# Altium PCB PCB.PcbDoc
Units mil, origin at the board's own origin, x right, y up, seen from the top; angles counter-clockwise.
Board outline 2320 x 2320 mil, 2 copper layers (Top Layer, Bottom Layer); 27 components, 30 nets, 103 pads, 4 vias.
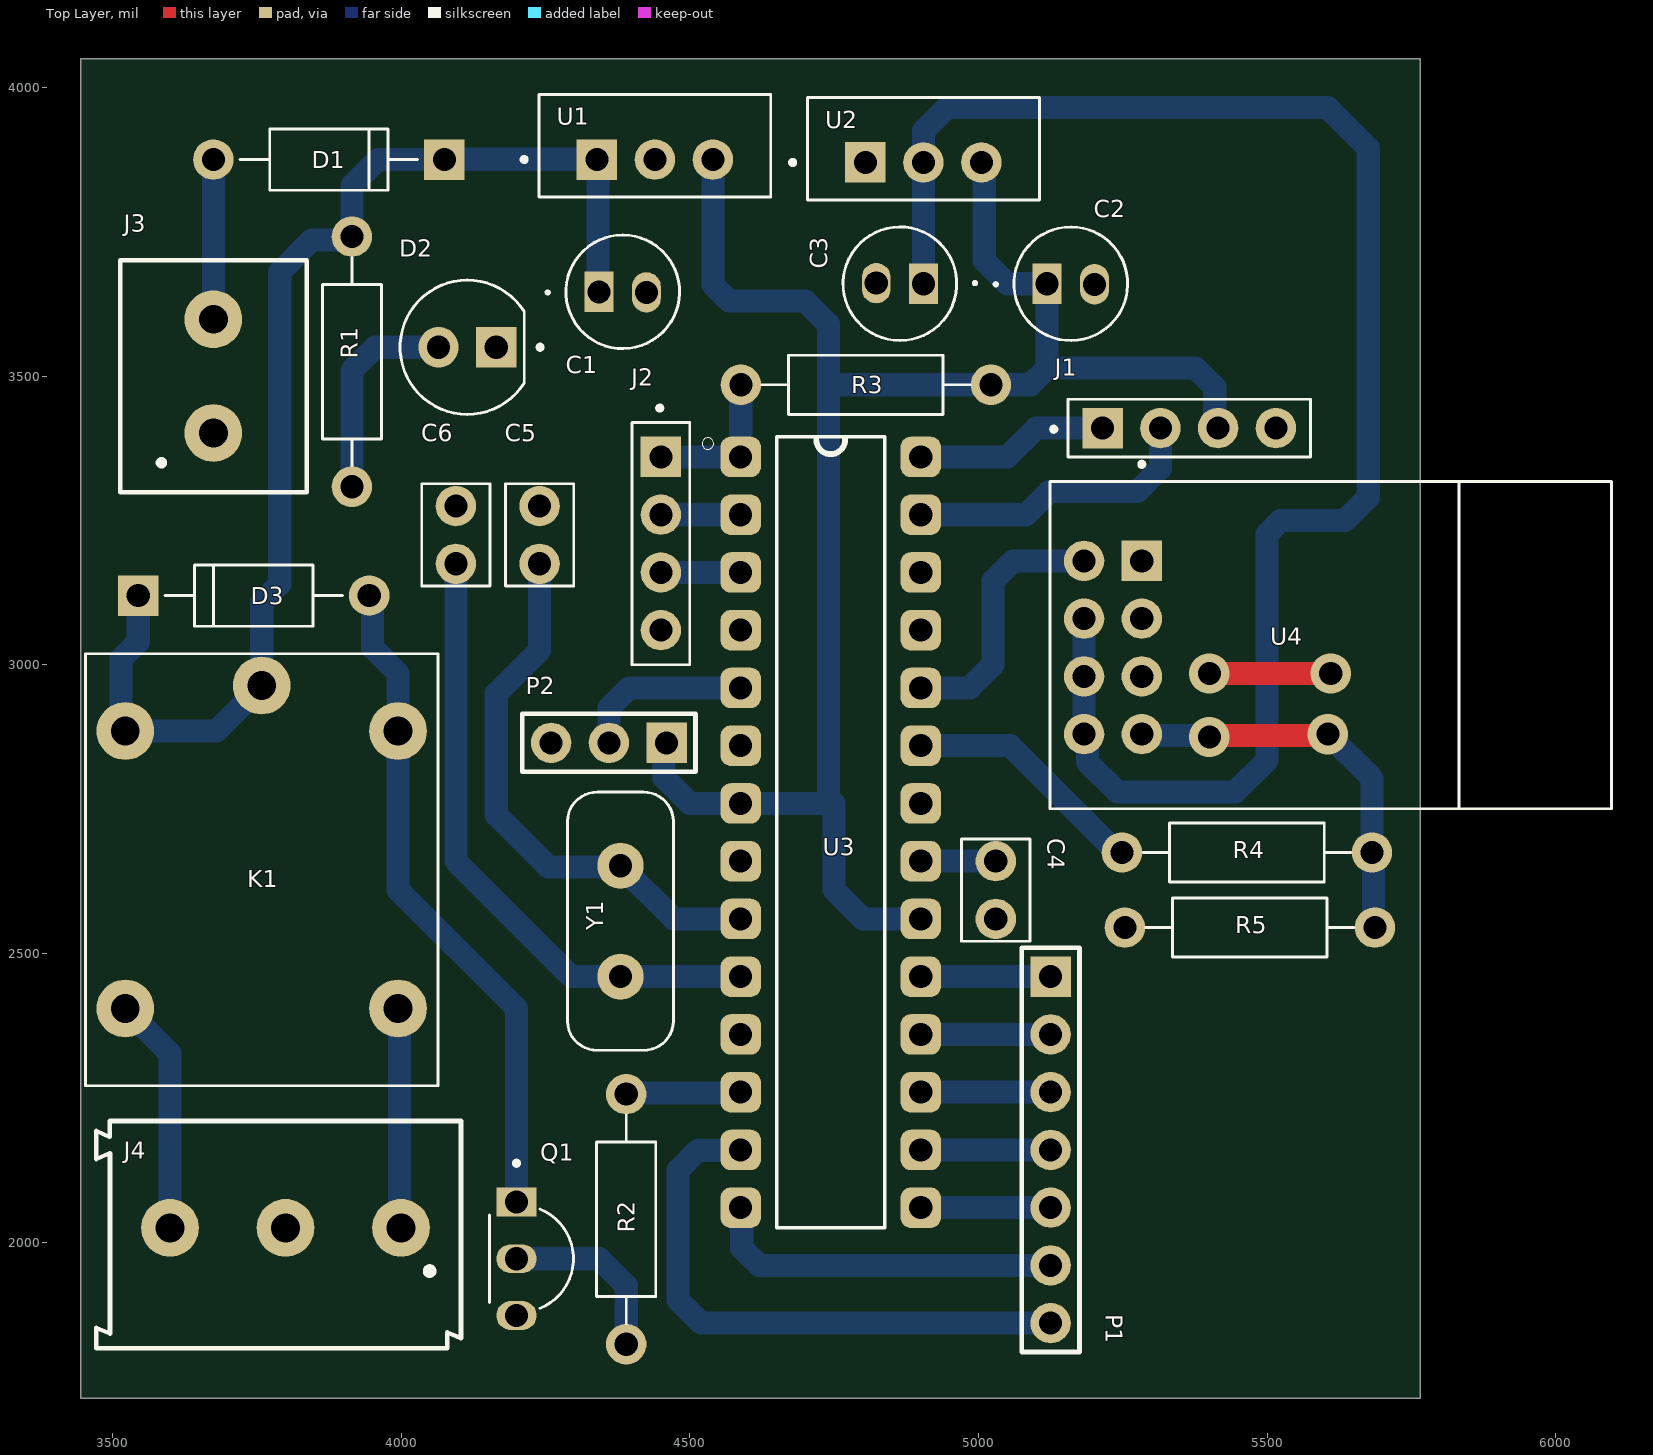
[diagram p0: Top Layer view]
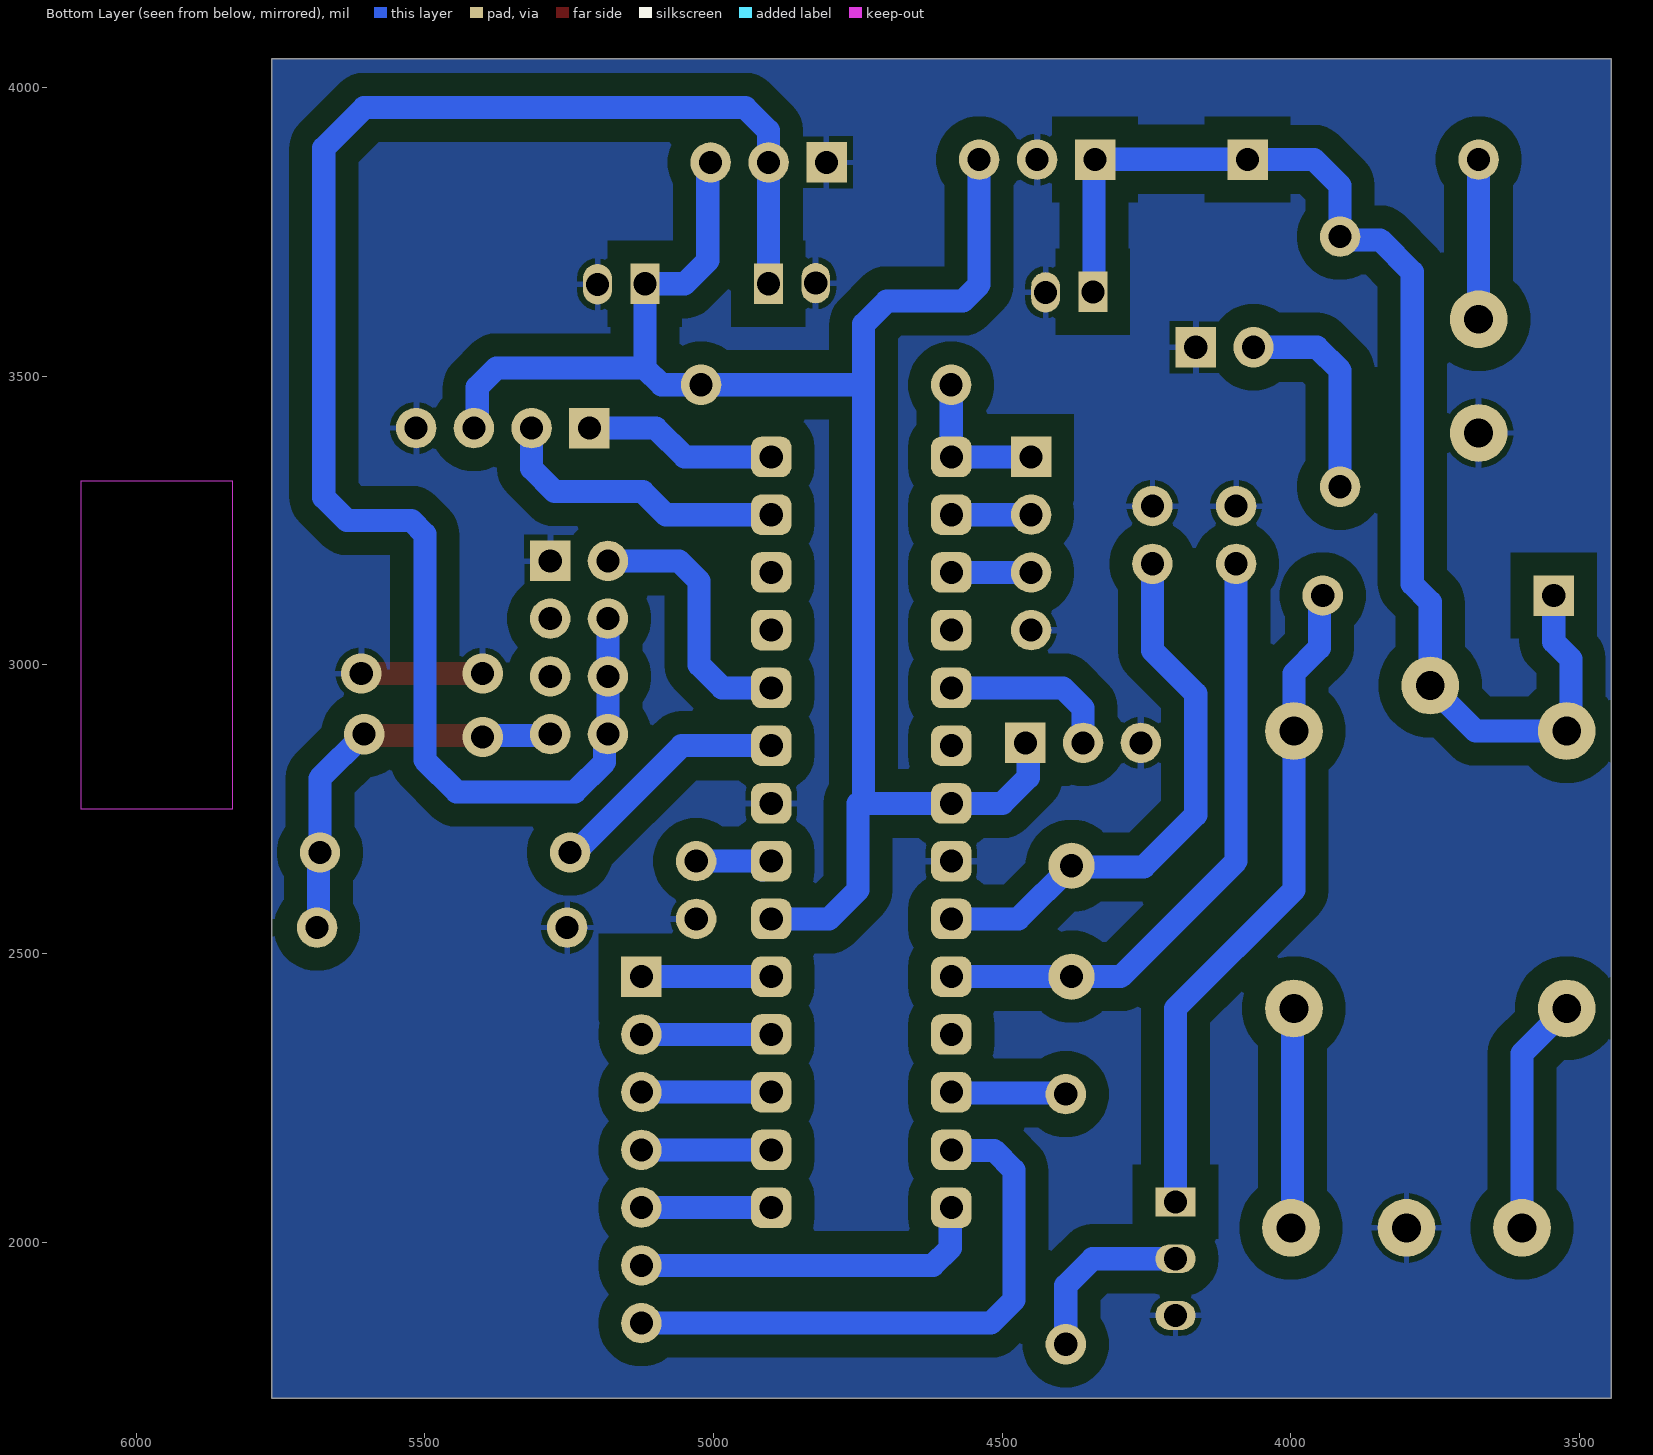
[diagram p1: Bottom Layer view, seen from below]
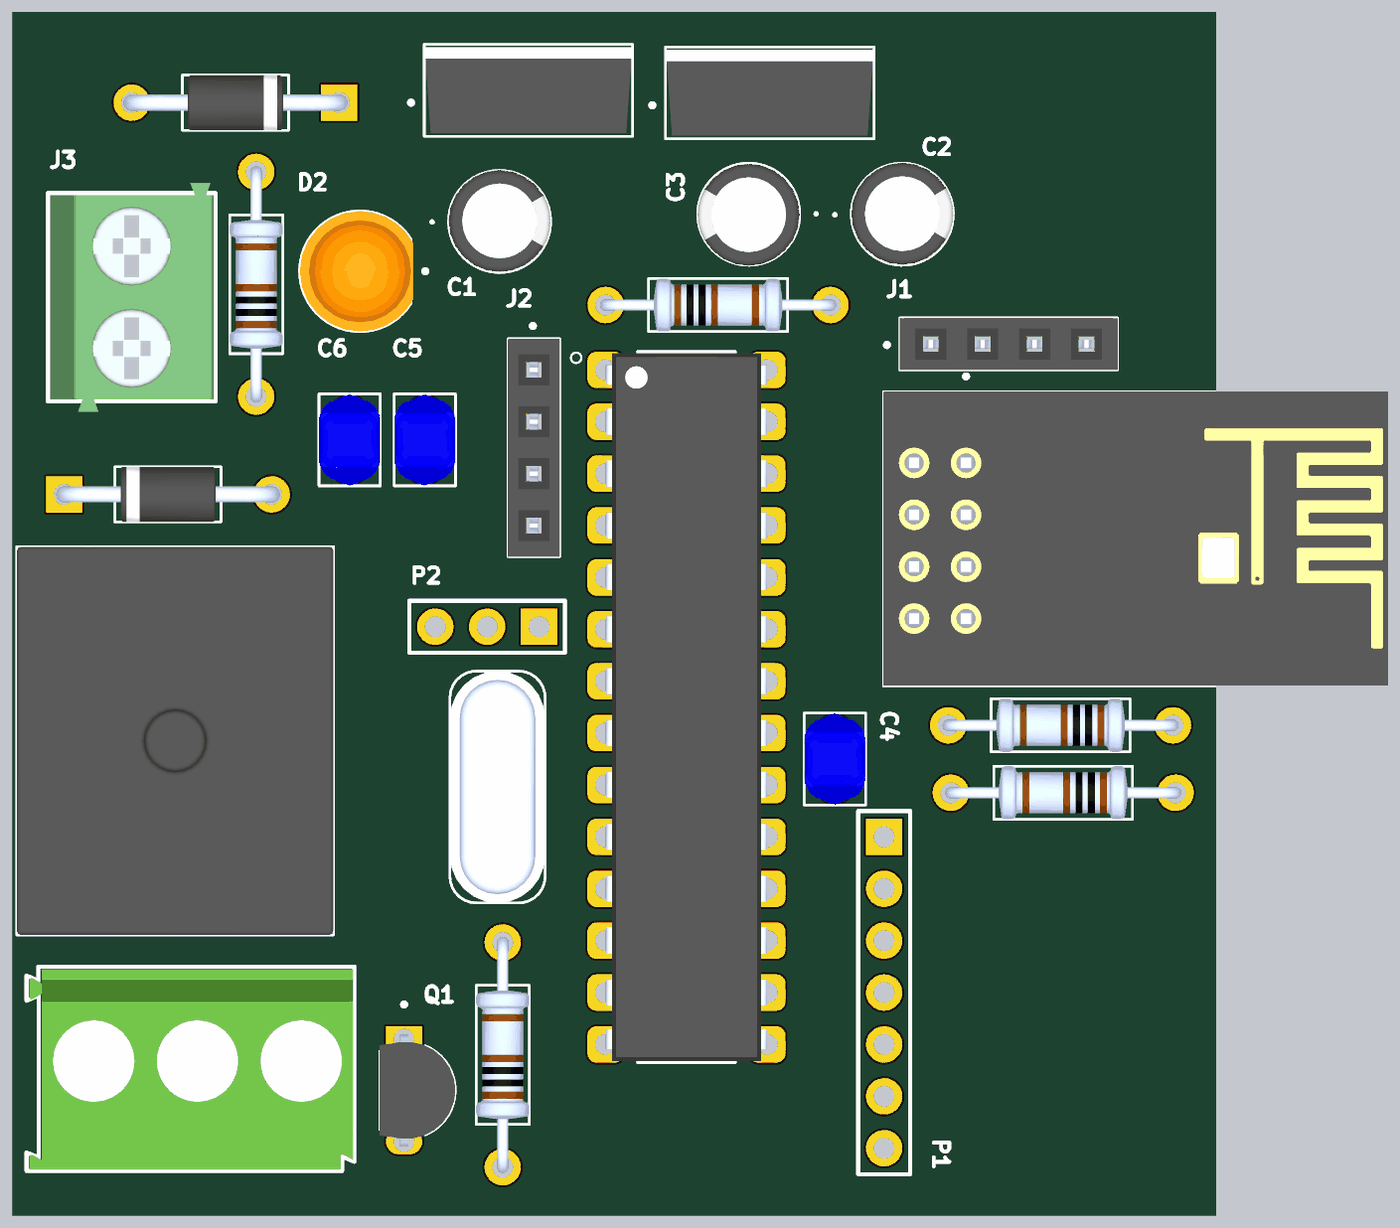
[diagram p2: 3D render of the assembled board from above, using the file's embedded part models]

## Layer stack, top to bottom
Top Solder: solder mask 0.4, Solder Resist, Dk 3.5
Top Layer: signal copper 1.4
Dielectric 1: dielectric 12.6, FR-4, Dk 4.8
Bottom Layer: signal copper 1.4
Bottom Solder: solder mask 0.4, Solder Resist, Dk 3.5

## Board outline
3445,1730 5765,1730 5765,4050 3445,4050

## Design rules (kind name [scope] priority, off if disabled: settings)
Clearance [All] p1: gap=30 ignorepadtopadclearanceinfootprint=FALSE
PolygonConnect [All] p1: connectstyle=Relief reliefconductorwidth=10 reliefentries=4 polygonreliefangle="90 Angle" airgapwidth=10
RoutingVias [All] p1: holewidth=40 width=70 viastyle="Through Hole" minholewidth=40 minwidth=70 maxholewidth=40 maxwidth=70
SolderMaskExpansion [All] p1: expansion=4 istentingtop=FALSE
Width [All] p1: maxlimit=60 minlimit=40 preferedwidth=50
30 further rules are at their usual default settings.

## Components (designator, comment, footprint, x,y, rotation, side; value= is the part's Value field where it differs from the comment)
C1 "100uF" CAPPRD500W50D500H1100 4384,3646 r0 top
C2 "10uF" CAPPRD500W50D500H1100 5160,3660 r0 top
C3 "10uF" CAPPRD500W50D500H1100 4864,3660 r180 top
C4 "100nF" CAPRB500W50L450T300H550 5030,2660 r270 top
C5 "22pF" CAPRB500W50L450T300H550 4240,3175 r90 top
C6 "22pF" CAPRB500W50L450T300H550 4095,3175 r90 top
D1 "1N4007" DIOAD1060W80L520D270 3875,3875 r180 top
D2 "L08R5000Q1" LEDRD254W57D500H1070 4115,3550 r180 top
D3 "1N4007" DIOAD1060W80L520D270 3745,3120 r0 top
J1 "Header 4" SULLINS_PPTC041LFBN-RC 5365,3410 r0 top
J2 "Header 4" SULLINS_PPTC041LFBN-RC 4450,3210 r270 top
J3 "691111710002" 691111710002 3675,3500 r90 top
J4 "691216510003S" "Terminal block - 3Pins" 3800,2025 r180 top
K1 "JQC-3F-1C-24VDC" RELAY_JQC-3F-1C-24VDC 3758.78,2645.16 r90 top
P1 "Header 7" HDR1X7 5125,2460 r270 top
P2 "Header 3" HDR1X3 4460,2865 r180 top
Q1 "BJT Transistor" TO92250P510H770-3 4225.79,1971.57 r270 top
R1 "1k" RESAD1100W55L680D260 3915,3525 r270 top
R2 "1k" RESAD1100W55L680D260 4390,2040 r270 top
R3 "10k" RESAD1100W55L680D260 4805,3485 r180 top
R4 "1k1" RESAD1100W55L680D260 5465,2675 r0 top
R5 "2k2" RESAD1100W55L680D260 5470,2545 r0 top
U1 "LM78__" TO255P1020X450X1968-3 4439.61,3898.82 r0 top
U2 "LD1117V33" TO255P1020X450X1968-3 4904.61,3893.82 r0 top
U3 "ATMEGA328P-PU" DIP794W46P254L2967H457Q28B 4744.09,2710 r0 top
U4 "ESP8266-01/ESP-01" XCVR_ESP8266-01/ESP-01 5610,3030 r270 top
Y1 "16MHz" XTAL_ECS-160-20-4X 4380,2556.06 r270 top

## Footprints (in the part's own frame and the unit in brackets; to place one, negate y for a bottom-side part, rotate by r counter-clockwise, add the part's x,y. Pads: shape width x height; smd on the part's side, far side on the other; paste and mask are expansions set on the pad)
691111710002 [mm]
  round 2.54 hole 1.27: 1(-2.5,0) 2(2.5,0)
  silkscreen extent -5.1,-4.1 5.1,4.1, body extent -5.6,-4 5.6,4, height 11.01
CAPPRD500W50D500H1100 [mil]
  oval 50x70 hole 40: N(41,-1)
  rect 50x70 hole 40: P(-41,0)
  silkscreen extent -131,-98 98,98, body extent -108,-97 108,99, height 434
CAPRB500W50L450T300H550 [mil]
  round 70 hole 40: 1(0,0) 2(100,0)
  silkscreen extent -39,-59 139,59, body extent -38,-59 138,59, height 210
DIOAD1060W80L520D270 [mil]
  round 70 hole 40: A(200,0)
  rect 70x70 hole 40: C(-200,0)
  silkscreen extent -154,-53 154,53, body extent -216,-53 216,53, height 99
DIP794W46P254L2967H457Q28B [mil]
  rrect50% 70x70 hole 40: 1(-155.91,650) 2(-155.91,550) 3(-155.91,450) 4(-155.91,350) 5(-155.91,250) 6(-155.91,150) 7(-155.91,50) 8(-155.91,-50) 9(-155.91,-150) 10(-155.91,-250) 11(-155.91,-350) 12(-155.91,-450) 13(-155.91,-550) 14(-155.91,-650) 15(155.91,-650) 16(155.91,-550) 17(155.91,-450) 18(155.91,-350) 19(155.91,-250) 20(155.91,-150) 21(155.91,-50) 22(155.91,50) 23(155.91,150) 24(155.91,250) 25(155.91,350) 26(155.91,450) 27(155.91,550) 28(155.91,650)
  silkscreen extent -223,-685 94,685, body extent -156,-682 156,683, height 180
HDR1X3 [mil] "Connector; Header; 3 Position"
  rect 70x70 hole 40: 1(0,0)
  round 70 hole 40: 2(100,0) 3(200,0)
  silkscreen extent -50,-50 250,50
HDR1X7 [mil] "Connector; Header; 7 Position"
  rect 70x70 hole 40: 1(0,0)
  round 70 hole 40: 2(100,0) 3(200,0) 4(300,0) 5(400,0) 6(500,0) 7(600,0)
  silkscreen extent -50,-50 650,50
LEDRD254W57D500H1070 [mil]
  round 70 hole 40: A(50,0)
  rect 70x70 hole 40: C(-50,0)
  silkscreen extent -130,-116 116,116, body extent -102,-116 116,116, height 358
RELAY_JQC-3F-1C-24VDC [mm]
  round 2.54 hole 1.27: COIL1(6.1,6) COIL2(6.1,-6) COM(8.1,0) NC(-6.1,-6) NO(-6.1,6)
  silkscreen extent -9.5,-7.75 9.5,7.75, body extent -9.5,-7.75 9.5,7.75, height 15.51
RESAD1100W55L680D260 [mil]
  round 70 hole 40: 1(-216.54,0) 2(216.54,0)
  silkscreen extent -180,-51 180,51, body extent -227,-51 227,51, height 101
SULLINS_PPTC041LFBN-RC [mil]
  rect 70x70 hole 40: 1(-150,0)
  round 70 hole 40: 2(-50,0) 3(50,0) 4(150,0)
  silkscreen extent -239,-50 210,50, body extent -210,-50 210,50, height 335
"Terminal block - 3Pins" [mil]
  round 100 hole 50: 1(-200,0) 2(0,0) 3(200,0)
  silkscreen extent -304,-185 328,209, body extent -302,-180 322,206, height 543
TO255P1020X450X1968-3 [mil]
  rect 70x70 hole 40: 1(-100.39,-23.82)
  round 70 hole 40: 2(0,-23.82) 3(100.39,-23.82)
  silkscreen extent -230,-89 201,89, body extent -200,-82 200,83, height 901
TO92250P510H770-3 [mil]
  rect 50x70 hole 40: 1(-98.43,-25.79)
  oval 50x70 hole 40: 2(0,-25.79) 3(98.43,-25.79)
  silkscreen extent -169,-73 86,73, body extent -107,-73 107,73, height 343
XCVR_ESP8266-01/ESP-01 [mil]
  rect 70x70 hole 40: 1(-150,-327.17)
  round 70 hole 40: 2(-50,-327.17) 3(50,-327.17) 4(150,-327.17) 5(-150,-427.17) 6(-50,-427.17) 7(50,-427.17) 8(150,-427.17)
  Keep-Out Layer region: 279.13,222.44 -287.8,222.44 -287.8,486.22 279.13,486.22
  silkscreen extent -321,-486 279,486, body extent -288,-486 278,486, height 256
XTAL_ECS-160-20-4X [mil]
  round 80 hole 40: 1(-96.06,0) 2(96.06,0)
  silkscreen extent -223,-92 223,92, body extent -223,-92 223,92, height 138

## Part data
C1 C2 C3: library part "Electrolytic capacitor", "FS-A", Package=None, Availability=Unavailable, MF="{'manufacturer': u'Panasonic'}", MP=EEUFS0J221B, Price=None
C4 C5 C6: library part "Ceramic capacitor", "2200 pF Â±10% 250V Ceramic Capacitor X7R Radial", Package="Radial TDK", Check_prices=https://www.snapeda.com/parts/FG24X7R2E222KNT06/TDK/view-part/?ref=eda, Digi-Key_Part_Number=445-173386-1-ND, MF=TDK, MP=FG24X7R2E222KNT06, Purchase-URL=https://pricing.snapeda.com/search/part/FG24X7R2E222KNT06/?ref=eda, SnapEDA_Link=https://www.snapeda.com/parts/FG24X7R2E222KNT06/TDK/view-part/?ref=snap
D1 D3: "Diode Switching 1KV 1A 2-Pin DO-41", Package=None, Availability=Unavailable, MP=1N4007, Price=None
D2: library part LED, "LED, Orange, Through Hole, T-1 3/4 (5mm), 30 mA, 2.1 V, 635 nm", Package=None, Availability=Unavailable, MF="{'manufacturer': u'LED Technology'}", MP=L08R5000Q1, Price=None
J1 J2: library part "Female header - 4Pins", "4 Position Header Connector Through Hole", Package=None, Availability=Warning, Check_prices=https://www.snapeda.com/parts/PPTC041LFBN-RC/Sullins%20Connector%20Solutions/view-part/285917/?ref=eda, MF="Sullins Connector", MP=PPTC041LFBN-RC, Price=None, Purchase-URL=https://pricing.snapeda.com/search/part/PPTC041LFBN-RC/?ref=eda, SnapEDA_Link=https://www.snapeda.com/parts/PPTC041LFBN-RC/Sullins%20Connector%20Solutions/view-part/285917/?ref=snap
J3: library part "Terminal Block - 2Pins", "2 Position Wire to Board Terminal Block Horizontal with Board 0.197 _5.00mm_ Through Hole", Package=None, Availability=Unavailable, MF="Wurth Electronics", MP=691111710002, Price=None, SnapEDA_Link=https://www.snapeda.com/parts/691111710002/Wurth%20Electronics%20Inc./view-part/1195092/?ref=snap
J4: library part "3Pins Terminal block", "5.08 MM TERMINAL BLOCK;", Package=None, Availability="In Stock", Check_prices=https://www.snapeda.com/parts/691216510003S/Wurth+Electronics+Inc/view-part/?ref=eda, MF="Wurth Electronics", MP=691216510003S, Price=None, Purchase-URL=https://pricing.snapeda.com/search/part/691216510003S/?ref=eda, SnapEDA_Link=https://www.snapeda.com/parts/691216510003S/Wurth+Electronics+Inc/view-part/?ref=snap
K1: library part "Relay (Standard)", "Miniature PCB Relay 24VDC, 10A 250VAC, 15A 125VAC, 10A 250VAC", Package=None, Availability=Unavailable, MP=JQC-3F-1C-24VDC, Price=None
P1: "Header, 7-Pin", LatestRevisionDate=17-Jul-2002, LatestRevisionNote="Re-released for DXP Platform.", Publisher="Altium Limited"
P2: "Header, 3-Pin", LatestRevisionDate=17-Jul-2002, LatestRevisionNote="Re-released for DXP Platform.", Publisher="Altium Limited"
Q1: library part BC547B, "<a href=\"https://pricing.snapeda.com/parts/BC337-16%20A1/Taiwan%20Semiconductor/view-part?ref=eda\">Check availability</a> <a href=\"https://pricing.snapeda.com/parts/BC337-16%20A1/Taiwan%20Semiconductor/view-part?ref=eda\">Check availability</a>", Package=None, Availability=Unavailable, MP=BC547B, Price=None
R1 R2 R3 R4 R5: library part "Resistor (0.25W)", "(MFR-25FBF52-10K) 10,2 kOhm bei 1% 0,25W, 1/4W Durchbohrlochwiderstand Axial Metal Film", Package="Axial Yageo", Digi-Key_Part_Number=10.2KXBK-ND, MF=Yageo, MP=MFR-25FBF52-10K, Purchase-URL=https://pricing.snapeda.com/search/part/MFR-25FBF52-10K/?ref=eda, SnapEDA_Link=https://www.snapeda.com/parts/MFR-25FBF52-10K/Yageo/view-part/424333/?ref=snap
U1 U2: Package=None, Availability=Unavailable, Price=None
  U1: MP=LM7805CT/NOPB
  U2: MP=LD1117V33
U3: "ATmega Series 20 MHz 32 KB Flash 2 KB SRAM 8-Bit Microcontroller - DIP-28", Package=None, Availability=Unavailable, MP=ATMEGA328P-PU, Price=None
U4: library part "ESP8266-01 Module", "MakerFocus 4pcs ESP8266 ESP-01 Serial Wireless WiFi Transceiver Receiver Module 1MB SPI Flash DC3.0-3.6V Internet of Things WiFi Module Board Compatible with Ar duino", Package=None, Availability=Unavailable, MP=ESP8266-01/ESP-01, Price=None
Y1: library part "Crystal oscilator", "CRYSTAL T/H", Package=None, Availability=Unavailable, MF="{'manufacturer': u'ECS Inc.'}", MP=ECS-160-S-4, Price=None

## Via types
v1: diameter 70, hole 40, Top Layer to Bottom Layer, 4 vias

## Nets (pads, with @x,y where several pads share a name; then routed paths per layer and width w, separated by ;. In a path a pad name is that pad's centre, name@x,y a point inside that pad or via, vN(x,y) a via of type N, cw(c..) or ccw(c..) an arc to the next point about the centre after c; other vN are vias at no path point)
+3V3: C3.P U2.2 U4.6 U4.7 U4.8 | length 2885.2
  Bottom Layer w40: C3.P 4904.8,3660.2 4904.8,3869.8 U2.2 4905,3870.39 4905,3925 4945,3965 5605,3965 5675,3895 5675,3290 5635,3250 5523.43,3250 5500,3226.57 5500,2835 5445,2780 5240,2780 5188.57,2831.43 5188.57,2874.26 U4.8 U4.7 U4.6
+12: C1.P D1.C D3.C K1.COIL1 K1.COM R1.1 U1.1 | length 2140.4
  Bottom Layer w40: D3.C 3545,3040 3515,3010 3515,2892.87 K1.COIL1 3680.04,2885.32 K1.COM 3758.78,3108.78 3790,3140 3790,3680 3845.8,3735.8 3909.26,3735.8 R1.1 3915,3830 3960,3875 D1.C 4075.59,3875.59 U1.1@4319.02,3875.59 ; U1.1 4341.11,3873.11 4341.11,3647.89 C1.P
esp_rx: R4.1 U3.23 | length 425.1
  Bottom Layer w40: U3.23 5055,2860 5225,2690 5225.35,2690 5240.35,2675 R4.1
esp_tx: U3.24 U4.5 | length 458.9
  Bottom Layer w40: U3.24 4985,2960 5025,3000 5025,3145 5060,3180 U4.5
GND: C1.N C2.N C3.N C4.2 C5.2 C6.2 D2.C J1.4 J2.4 J3.1 J4.2 P2.3 Q1.3 R5.1 U1.2 U2.1 U3.8 U3.22 U4.1 | length 210
  Top Layer w40: v1(5400,2985) v1(5610,2985)
keypad: P1.7 U3.13 | length 1009.3
  Bottom Layer w40: U3.13 4573.9,2160 4573.19,2159.29 4514.29,2159.29 4480,2125 4480,1900 4520,1860 P1.7
NetC4_1: C4.1 U3.21 | length 151.2
  Bottom Layer w40: U3.21@4915,2645 U3.21 C4.1
NetD1_A: D1.A J3.2 | length 276.6
  Bottom Layer w40: J3.2 D1.A
NetD2_A: D2.A R1.2 | length 368.1
  Bottom Layer w40: R1.2 3915,3510 3955,3550 D2.A
NetD3_A: D3.A K1.COIL2 Q1.1 | length 1155.6
  Bottom Layer w40: D3.A 3950.74,3114.26 3950.74,3029.26 3995,2985 K1.COIL2 3995,2610 4200,2405 Q1.1
NetJ4_1: J4.1 K1.NC | length 382.1
  Bottom Layer w40: K1.NC 3997.5,2402.5 3997.5,2027.5 J4.1
NetJ4_3: J4.3 K1.NO | length 412.1
  Bottom Layer w40: K1.NO 3522.56,2404.32 3600,2326.88 J4.3
NetP1_1: P1.1 U3.19 | length 225
  Bottom Layer w40: U3.19 P1.1
NetP1_2: P1.2 U3.18 | length 225
  Bottom Layer w40: U3.18 P1.2
NetP1_3: P1.3 U3.17 | length 225
  Bottom Layer w40: U3.17 P1.3
NetP1_4: P1.4 U3.16 | length 225
  Bottom Layer w40: U3.16 P1.4
NetP1_5: P1.5 U3.15 | length 225
  Bottom Layer w40: U3.15 P1.5
NetP1_6: P1.6 U3.14 | length 618.2
  Bottom Layer w40: U3.14 4590,2058.19 4590,1990 4620,1960 P1.6
NetP2_2: P2.2 U3.5 | length 302.7
  Bottom Layer w40: P2.2 4360,2925 4395,2960 U3.5
NetQ1_2: Q1.2 R2.2 | length 310.8
  Bottom Layer w40: Q1.2 4343.43,1971.57 4390,1925 R2.2
NetR4_2: R4.2 R5.2 U4.4 | length 695.1
  Top Layer w40: v1(5400,2875) 5402.5,2877.5 5602.5,2877.5 v1(5605,2880)
  Bottom Layer w40: U4.4 5285.33,2877.5 5397.5,2877.5 v1(5400,2875) ; v1(5605,2880) 5681.54,2803.46 R4.2 5684.04,2672.5 5684.04,2547.5 R5.2
reset: J2.1 R3.2 U3.1 | length 263.3
  Bottom Layer w40: J2.1 U3.1 4588.33,3360.14 4588.33,3484.86 R3.2
rx: J2.3 U3.3 | length 138.2
  Bottom Layer w40: J2.3 U3.3
SCL: J1.1 U3.28 | length 335.7
  Bottom Layer w40: U3.28 5050,3360 5100,3410 J1.1
SDA: J1.2 U3.27 | length 518.1
  Bottom Layer w40: U3.27 5082.5,3260 5122.5,3300 5275,3300 5315,3340 J1.2
tx: J2.2 U3.2 | length 138.2
  Bottom Layer w40: J2.2 U3.2
valve: R2.1 U3.12 | length 199.6
  Bottom Layer w40: R2.1 4391.73,2258.27 4586.46,2258.27 U3.12
VCC: C2.P J1.3 P2.1 R3.1 U1.3 U2.3 U3.7 U3.20 | length 3171.3
  Bottom Layer w40: P2.1 4455,2860 4455,2805 4500,2760 U3.7 4740,2760 ; U1.3@4545.74,3880.74 U1.3 4540,3658.43 4568.43,3630 4700,3630 4740,3590 4740,2760 ; 4760,3485 R3.1 5090,3485 5119,3514 ; U3.20 4800,2560 4750,2610 4750,2760 4740,2760 ; U2.3 5010,3865 5010,3700 5050,3660 C2.P 5119,3514 ; J1.3 5409.26,3415.74 5409.26,3480.74 5376,3514 5119,3514
xtal1: C5.1 U3.9 Y1.1 | length 965.6
  Bottom Layer w40: C5.1 4240,3025 4165,2950 4165,2740 4255,2650 4377.87,2650 Y1.1 4472.13,2560 U3.9
xtal2: C6.1 U3.10 Y1.2 | length 1091
  Bottom Layer w40: C6.1 4095,2660 4295,2460 U3.10
pads on no net: U3.4 U3.6 U3.11 U3.25 U3.26 U4.2 U4.3

## Polygon pours and split planes (outlines as drawn)
GND on Bottom Layer "GND_L02_P000" (solid, pour order 0): 3445,4050 3445,1730 5765,1730 5765,4050